# Allegro board TEO_PCB.brd
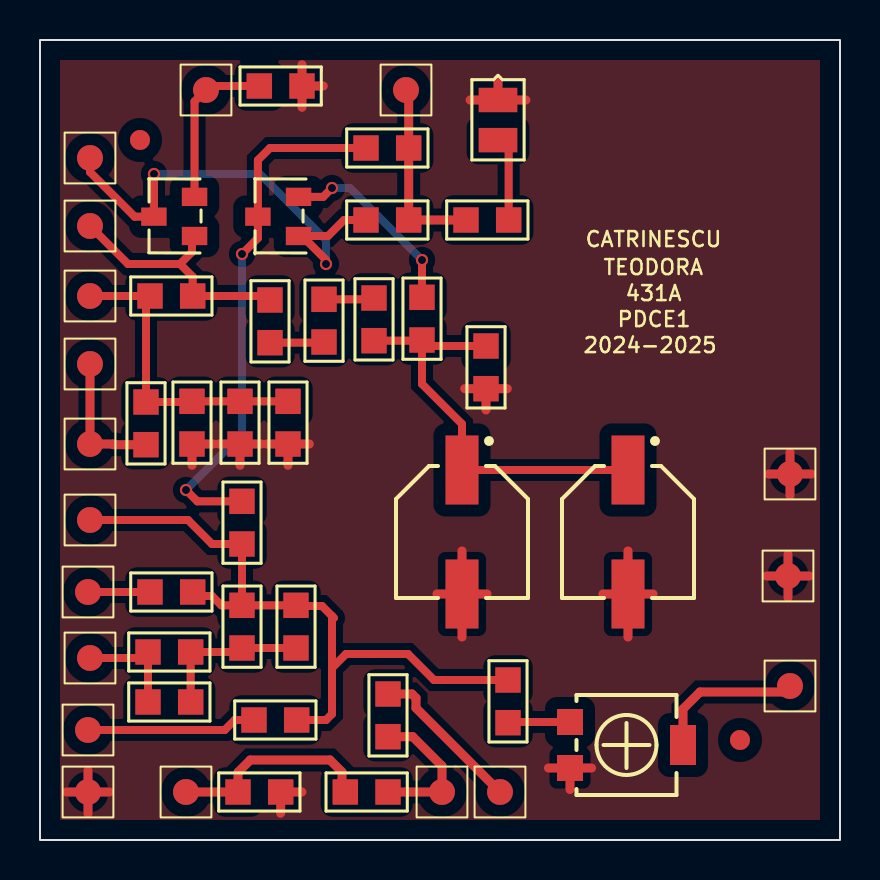
[diagram p0: board, top side]
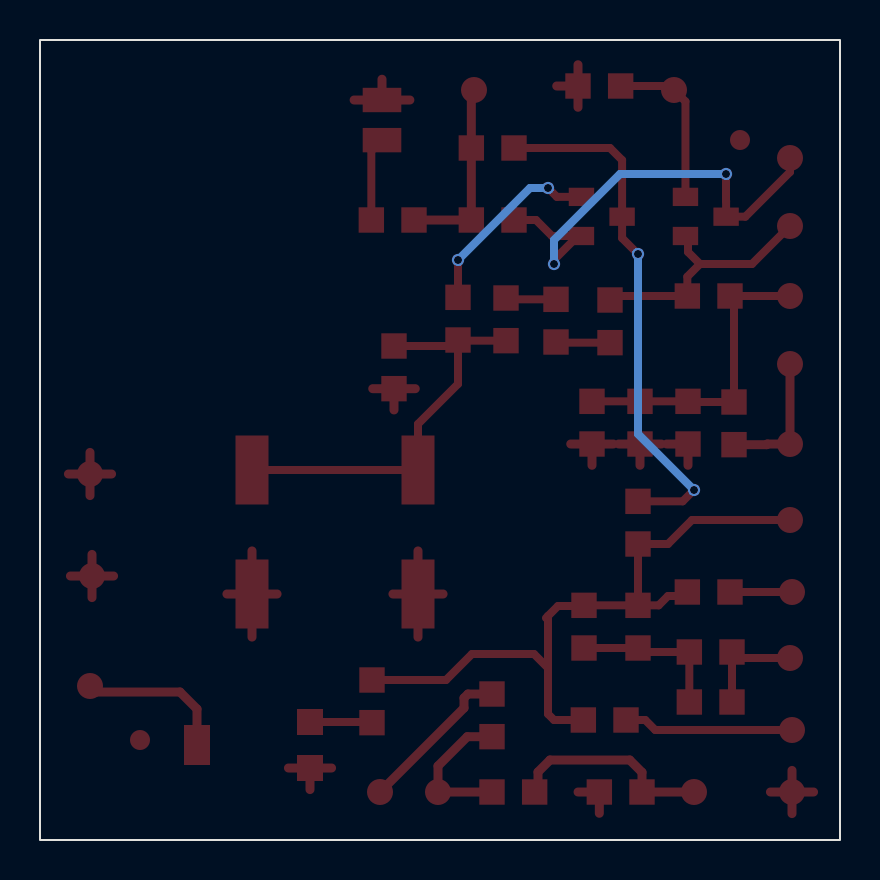
[diagram p1: board, bottom side, seen from below]

Outline 40 x 40 mm; copper layers: TOP, BOTTOM. Coordinates in mm from the lower left corner of the outline.
Outline path: rectangle 0,0 40,40

## Design rules (mm)
nets with their own width: min track width 0.4; nets N37115 N37161 N37175 N37207 N37251 N37297 N37345 N37349 N37375 N37563 N37569 N40077 N40081 N40426 N40430 N425961
nets with their own width: min track width 0.45; nets CAS GND IN MIC OUT PIZ VCC

## Placement (name value [footprint] x y rotation side)
C1  4.7u  [SMC0805]  5.5 27.2 0 top
C7  4.7u  [SMC0805]  10.1 14.8 90 top
C9  4.7u  [SMC0805]  23.4 8 270 top
C10  1n  [SMC0805]  5.4 9.4 0 top
C11  2.2n  [SMC0805]  12.8 9.6 90 top
C12  10u  [CAPAE660X770N]  21.1 15.4 270 top
C13  10u  [CAPAE660X770N]  29.4 15.4 270 top
D1  LED  [SMD0805]  22.9 37 270 top
J1  CON1  [JUMPER1]  2.5 27.2 0 top
J2  CON1  [JUMPER1]  2.5 30.7 0 top
J3  CON1  [JUMPER1]  2.5 34.1 0 top
J4  GND  [JUMPER1]  2.4 2.4 0 top
J5  Vcc  [JUMPER1]  18.3 37.5 0 top
J6  OUT  [JUMPER1]  37.5 7.7 0 top
J7  Vcc GND  [JUMPER1]  37.5 18.3 0 top
J8  OUT GND  [JUMPER1]  37.4 13.2 0 top
J9  CON1  [JUMPER1]  8.3 37.5 0 top
J10  CON1  [JUMPER1]  2.4 12.4 0 top
J11  CON1  [JUMPER1]  2.4 5.5 0 top
J12  CON1  [JUMPER1]  2.5 9.1 0 top
J13  TEST POINT OUT  [JUMPER1]  2.5 16 0 top
J14  IN CON  [JUMPER1]  2.5 23.8 0 top
J15  TEST POINT IN  [JUMPER1]  2.5 19.8 0 top
J16  IN1  [JUMPER1]  23 2.4 0 top
J17  IN2  [JUMPER1]  20.1 2.4 0 top
J18  IN3  [JUMPER1]  7.3 2.4 0 top
NOREF  -  []  40 0 90 top
NOREF#2  -  [unnamed#2]  35 5 0 top
NOREF#3  -  []  0 40 0 top
NOREF#4  -  [unnamed#2]  5 35 0 top
POT  50k  [TS53YL]  26.5 3.6 180 top
Q1  BC846B  [TO236]  7.6 30.2 0 top
Q2  BC846B  [TO236]  12.8 30.2 0 top
R1  1000k  [SMR0805]  5.3 21.9 270 top
R2  15k  [SMR0805]  7.6 19.8 90 top
R3  100k  [SMR0805]  10 19.8 90 top
R4  100k  [SMR0805]  12.4 19.8 90 top
R5  1k  [SMR0805]  13.1 37.7 180 top
R6  330k  [SMR0805]  11.5 27 270 top
R7  15k  [SMR0805]  16.7 27.1 270 top
R8  1k  [SMR0805]  22.3 24.7 270 top
R9  220k  [SMR0805]  5.5 12.4 0 top
R13  1  [SMR0805]  19.1 25 90 top
R15  220k  [SMR0805]  16.3 31 0 top
R18  15k  [SMR0805]  16.3 34.6 0 top
R19  15k  [SMR0805]  14.2 24.9 90 top
R22  100k  [SMR0805]  10.7 6 0 top
R23  100k  [SMR0805]  5.4 6.9 0 top
R24  1Meg  [SMR0805]  10.1 9.6 90 top
R25  1Meg  [SMR0805]  17.4 7.3 270 top
R26  100k  [SMR0805]  17.4 2.4 180 top
R27  10k  [SMR0805]  9.9 2.4 0 top
R28  1k  [SMR0805]  21.3 31 0 top

## Library data of the parts
C1 C7 C9-C11 = C
C12 C13 = CAP POL
D1 = LED_1
J1-J18 = CON1: User Part Number: ***
POT = POT
Q1 Q2 = BC846B
R1-R9 R13 R15 R18 R19 R22-R28 = R

## Footprints (pads in the part's own frame, mm; a bottom-side part is the same pattern mirrored in y, then rotated)
CAPAE660X770N
  rect 3.45x1.65 smd: 1(-3.1,0) 2(3.1,0)
JUMPER1
  round 1.3 smd: 1(0,0)
SMC0805
  rect 1.27x1.27 smd: 1(0,0) 2(2.134,0)
SMD0805
  rect 1.219x1.93 smd: A(2.007,0) C(0,0)
SMR0805
  rect 1.27x1.27 smd: 1(0,0) 2(2.134,0)
TO236
  rect 1.27x0.914 smd: 1(0.127,0) 2(0.127,1.956) 3(-1.905,0.965)
TS53YL
  rect 1.3x1.3 smd: 1(0,0) 3(0,-2.3)
  rect 1.3x2 smd: 2(-5.65,-1.15)
unnamed#2
  round 1 smd: (0,0)

## Nets
GND: C12.2 C13.2 D1.C J4.1 J7.1 J8.1 POT.1 R2.1 R3.1 R4.1 R5.1 R8.2 R27.2
VCC: J5.1 R15.2 R18.2 R28.1
CAS: J17.1 R25.2 R26.1
IN: J14.1 J15.1 R1.2
MIC: J18.1 R26.2 R27.1
OUT: J6.1 POT.2(T)
PIZ: J16.1 R25.1
N37115: C7.2 Q2.3 R18.1
N37161: C7.1 C9.1 C11.2 J13.1 R9.2 R22.2 R24.2
N37175: C9.2 POT.3
N37207: J3.1 Q1.3 Q2.1 R15.1
N37251: Q2.2(E) R13.2
N37297: C1.2 J2.1 Q1.1 R6.1
N37345: J9.1 Q1.2(E) R5.2
N37349: C12.1 C13.1 R7.2 R8.1 R13.1
N37375: C1.1 J1.1 R1.1 R2.2 R3.2 R4.2
N37563: R6.2 R19.1
N37569: R7.1 R19.2
N40077: C10.2 C11.1 R23.2 R24.1
N40081: J11.1 R22.1
N40426: J10.1 R9.1
N40430: C10.1 J12.1 R23.1
N425961: D1.A R28.2

## Via types
v1: diameter 0.61, hole 0.4, TOP to BOTTOM, 6 vias

## Routing (per net, layer and track width the routed paths; a pad name or vN(x,y) marks a point on that pad's centre or on a via; arc(x,y) is an arc through that point)
GND: length 50.6
  TOP w0.45: C12.2 22.35,12.3 ; C12.2 21.1,10.15 ; C12.2 19.85,12.3 ; C12.2 21.1,14.45 ; 36.42,18.3 J7.1 ; J7.1 37.5,19.38 ; J7.1 38.58,18.3 ; J7.1 37.5,17.22 ; 1.32,2.4 J4.1 ; J4.1 2.4,3.48 ; J4.1 2.4,1.32 ; J4.1 3.48,2.4 ; 10,18.74 R3.1 ; R3.1 8.94,19.8 ; R3.1 11.06,19.8 ; 7.6,18.74 R2.1 8.66,19.8 ; 12.03,1.34 R27.2 13.1,2.4 ; C13.2 30.65,12.3 ; C13.2 29.4,14.45 ; C13.2 29.4,10.15 ; C13.2 28.15,12.3 ; R8.2 23.36,22.57 ; R8.2 21.24,22.57 ; R8.2 22.3,21.5 ; R4.1 13.46,19.8 ; R4.1 11.34,19.8 ; R4.1 12.4,18.74 ; R5.1 13.1,38.76 ; R5.1 13.1,36.64 ; R5.1 14.16,37.7 ; 37.4,12.12 J8.1 ; J8.1 37.4,14.28 ; J8.1 36.32,13.2 ; J8.1 38.48,13.2 ; D1.C 22.9,38.04 ; D1.C 24.29,37 ; D1.C 21.51,37 ; 26.5,2.52 POT.1 ; POT.1 25.42,3.6 ; POT.1 27.58,3.6
VCC: length 9.4
  TOP w0.45: J5.1 18.43,37.37 R18.2 R15.2 R28.1
CAS: length 7.3
  TOP w0.45: R25.2 18.63,5.17 20.1,3.7 J17.1 R26.1
IN: length 6.8
  TOP w0.45: J14.1 J15.1 3.63,19.8 3.67,19.77 R1.2
MIC: length 10.4
  TOP w0.45: J18.1 R27.1 9.9,3.39 10.51,4 14.5,4 15.1,3.4 15.1,2.57 R26.2
OUT: length 7.6
  TOP w0.45: J6.1 37.2,7.4 33,7.4 32.15,6.55 POT.2
PIZ: length 7.9
  TOP w0.45: J16.1 18.8,6.6 18.8,7.1 18.6,7.3 R25.1
N37115: length 26.7
  TOP w0.4: v1(7.3,17.5) 7.87,16.93 C7.2 ; v1(10.1,29.3) 10.89,30.09 Q2.3 10.89,33.99 11.5,34.6 R18.1
  BOTTOM w0.4: v1(7.3,17.5) 10.1,20.3 v1(10.1,29.3)
N37161: length 35.3
  TOP w0.4: R24.2 C7.1 8.6,14.8 7.4,16 J13.1 ; R24.2 C11.2 12.83,11.7 14.1,11.7 14.6,11.2 ; R24.2 9.07,11.73 8.6,12.2 7.83,12.2 R9.2 ; R24.2 10.2,11.83 ; C9.1 19.7,8 18.4,9.3 15.3,9.3 14.6,8.6 ; 14.6,8.6 14.6,6.3 14.3,6 R22.2 ; 14.6,8.6 14.6,11.2 ; 14.6,11.2 14.7,11.1
N37175: length 3.1
  TOP w0.4: POT.3 23.43,5.9 C9.2
N37207: length 23.7
  TOP w0.4: 13.1,30.2 14.3,29 v1(14.3,28.8) ; 13.1,30.2 14.4,30.2 15.2,31 R15.1 ; 13.1,30.2 Q2.1 ; v1(5.7,33.3) 5.7,31.95 5.7,31.95 5.7,31.17 4.73,31.17 2.5,33.4 J3.1
  BOTTOM w0.4: v1(5.7,33.3) 11,33.3 14.3,30 v1(14.3,28.8)
N37251: length 9.7
  TOP w0.4: v1(19.1,29) R13.2 ; v1(14.6,32.6) 14.16,32.16 Q2.2
  BOTTOM w0.4: v1(19.1,29) 15.5,32.6 v1(14.6,32.6)
N37297: length 12.8
  TOP w0.4: J2.1 4.4,28.8 7,28.8 ; 7,28.8 7.6,29.4 7.6,30.07 7.73,30.2 ; 7,28.8 7.63,28.17 C1.2 11.3,27.2 R6.1
N37345: length 8.3
  TOP w0.4: R5.2 8.5,37.7 J9.1 7.73,36.93 7.73,32.16
N37349: length 21.4
  TOP w0.4: C13.1 C12.1 21.1,20.8 19.1,22.8 R13.1 ; R13.1 19.4,24.7 R8.1 ; R13.1 19.07,24.97 R7.2
N37375: length 15.5
  TOP w0.4: R4.2 R3.2 R2.2 7.57,21.9 R1.1 5.3,27 C1.1 J1.1
N37563: length 2.7
  TOP w0.4: R19.1 14.17,24.87 R6.2
N37569: length 2.5
  TOP w0.4: R7.1 16.63,27.03 R19.2
N40077: length 7.8
  TOP w0.4: C11.1 R24.1 9.9,9.4 C10.2 R23.2
N40081: length 8.5
  TOP w0.4: J11.1 9.24,5.5 9.74,6 R22.1
N40426: length 3.1
  TOP w0.4: R9.1 J10.1
N40430: length 5.5
  TOP w0.4: J12.1 5.1,9.1 C10.1 R23.1
N425961: length 4.2
  TOP w0.4: R28.2 23.43,34.46 D1.A

## Copper pours and planes (outline as drawn; the poured copper is in the pictures)
GND on TOP: 1,1 1,39 39,39 39,1

## Text on the board
Ref Des/Silkscreen Top: 2024-2025 | CATRINESCU | TEODORA | PDCE1 | 431A
XSECTION_CHART: *  SURFACE | L1 TOP CONDUCTOR | *  DIELECTRIC | L2 BOTTOM CONDUCTOR | DESIGN CROSS SECTION CHART | ___________________________ | TOTAL THICKNESS 1.6 MM | 1-2
DIMENSION: FIGURE | FINISHED_SIZE | 0.4 | DRILL CHART: TOP to BOTTOM | ALL UNITS ARE IN MILLIMETERS | PLATED | QTY | 6
